# Altium PCB terminal.PcbDoc
Units mm, origin at the board's own origin, x right, y up, seen from the top; angles counter-clockwise.
Board outline 54 x 58 mm, 2 copper layers (Top Layer, Bottom Layer); 8 components, 6 nets, 42 pads, 2 vias.
Unrouted connection lines stored in the file: 3.
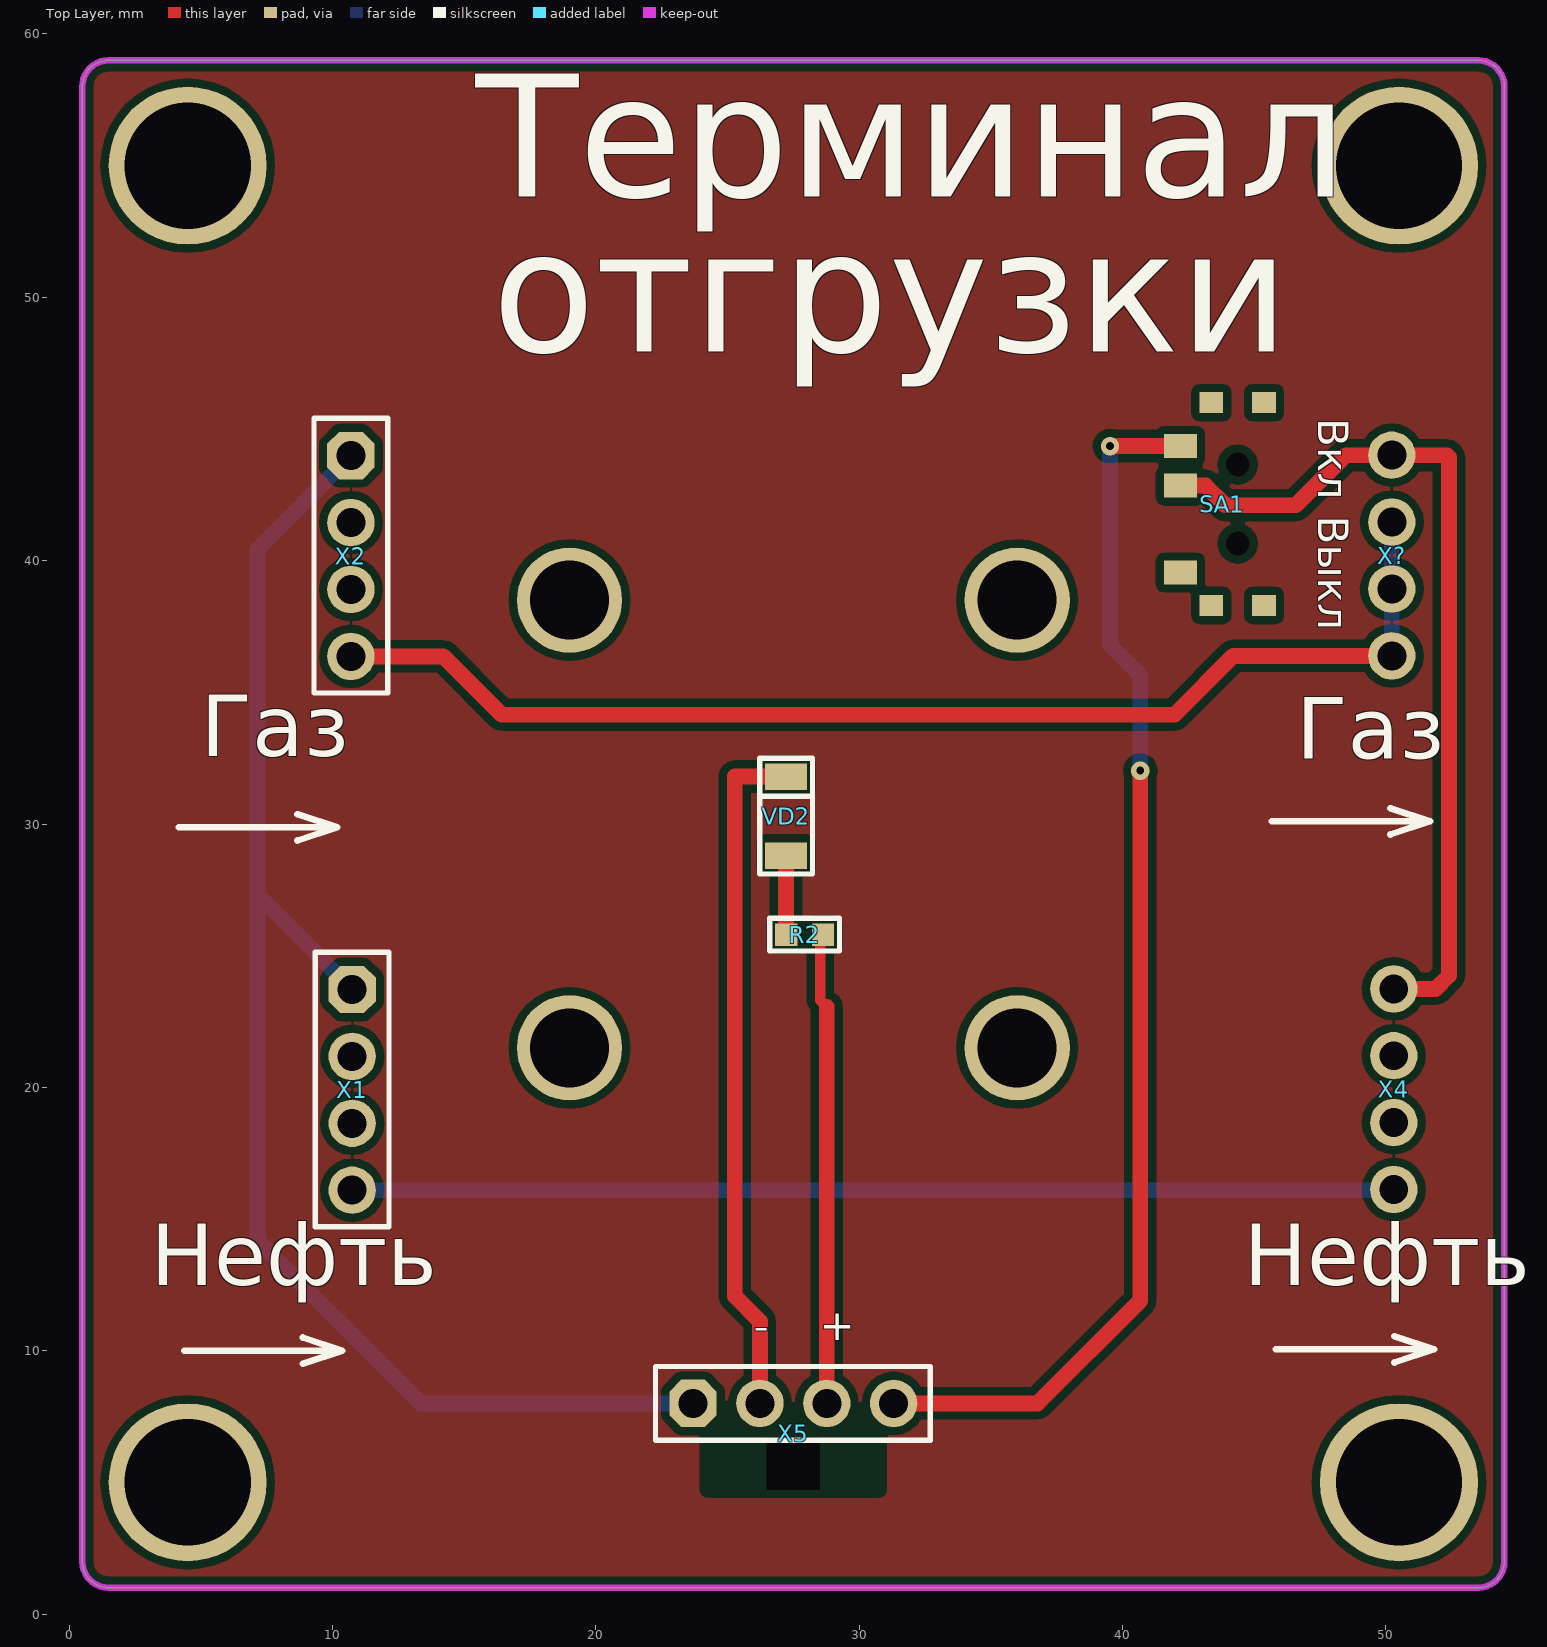
[diagram p0: Top Layer view]
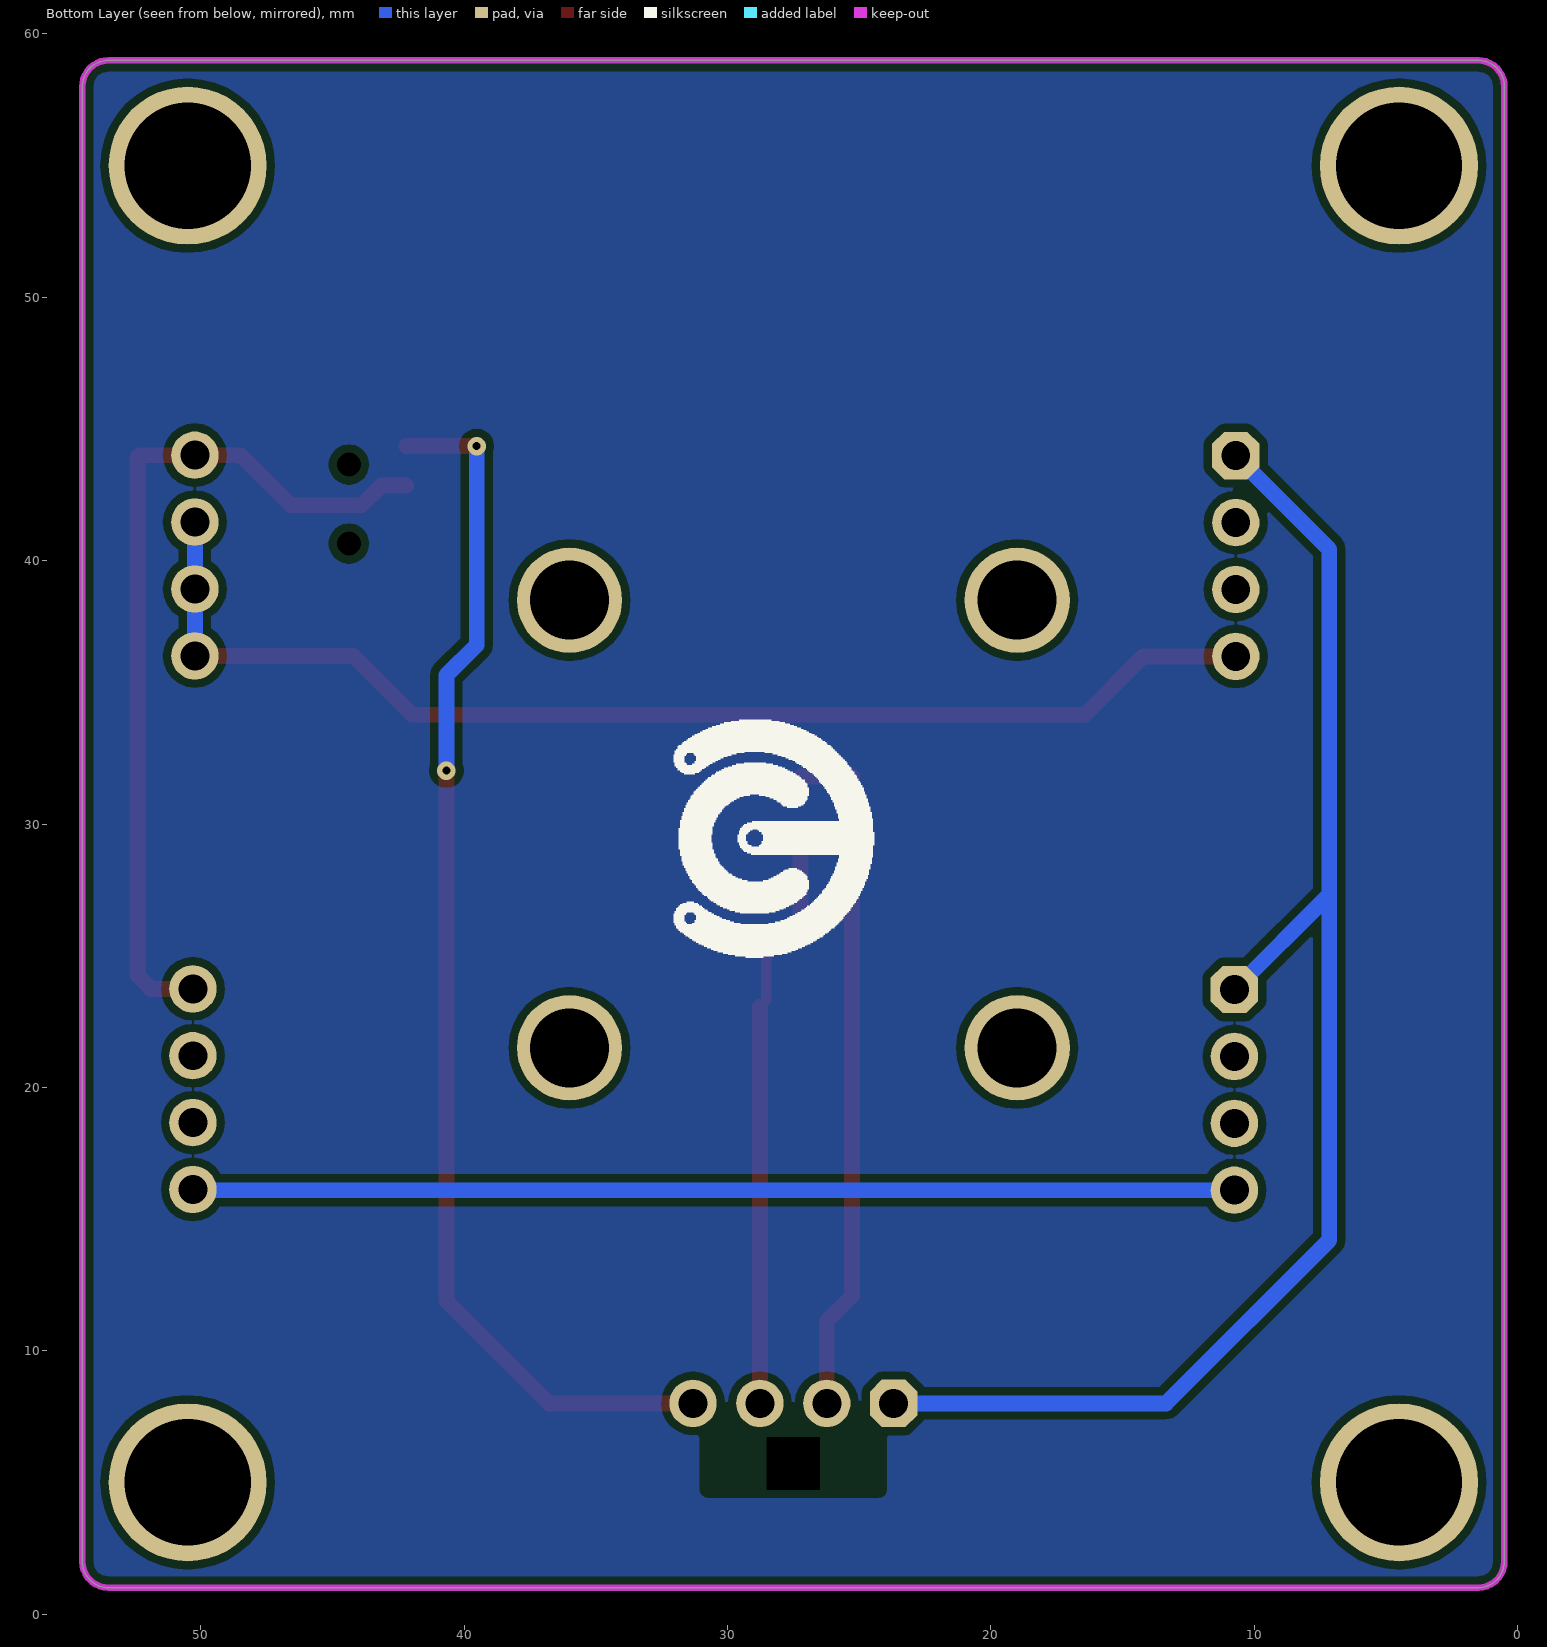
[diagram p1: Bottom Layer view, seen from below]

## Layer stack, top to bottom
Top Solder: solder mask 0.0102, Solder Resist, Dk 3.5
Top Layer: signal copper 0.0356
Dielectric 1: dielectric 0.32, FR-4, Dk 4.8
Bottom Layer: signal copper 0.0356
Bottom Solder: solder mask 0.0102, Solder Resist, Dk 3.5

## Board outline
0.5,2 ccw(c1.5,2) 1.5,1 53.5,1 ccw(c53.5,2) 54.5,2 54.5,58 ccw(c53.5,58) 53.5,59 1.5,59 ccw(c1.5,58) 0.5,58

## Design rules (kind name [scope] priority, off if disabled: settings)
Clearance [All] p1: gap=0.3 ignorepadtopadclearanceinfootprint=FALSE
PolygonConnect [All] p1: connectstyle=Relief reliefconductorwidth=0.254 reliefentries=4 polygonreliefangle="90 Angle" airgapwidth=0.254
RoutingVias [All] p1: holewidth=0.711 width=1.27 viastyle="Through Hole" minholewidth=0.711 minwidth=1.27 maxholewidth=0.711 maxwidth=1.27
SolderMaskExpansion [All] p1: expansion=0.102
Width [All] p1: maxlimit=10 minlimit=0.254 preferedwidth=0.254 minimp=50.000000 maximp=50.000000 favimp=50.000000
30 further rules are at their usual default settings.

## Components (designator, comment, footprint, x,y, rotation, side; value= is the part's Value field where it differs from the comment)
R2 "Resistor film, 100R, ±5%, 0603, 0.1W, -55...+125°C" "RES: 0603" 27.925,25.8 r0 top value=100R
SA1 "SS-3292S-L1" SS-3292S-L1 44.375,42.126 r0 top
VD2 "LED, *, *, *, -55...+150°C" "LED: 1206R" 27.225,30.3 r90 top
X1 "Connector, 4pin, 2.54mm, 500VAC, 3A" "CON: PBS-4 R" 10.75,19.905 r270 top
X2 "Connector, 4pin, 2.54mm, 500VAC, 3A" "CON: PBS-4 R" 10.7,40.175 r270 top
X4 "Connector, 4pin, 2.54mm, 500VAC, 3A" "4PLS RIGHT ANGLE 2" 50.3,19.93 r270 top
X5 "PBS-4 cut" "PBS-4 CUT" 27.5,8 r0 top
X? "Connector, 4pin, 2.54mm, 500VAC, 3A" "4PLS RIGHT ANGLE 2" 50.225,40.195 r270 top

## Footprints (in the part's own frame and the unit in brackets; to place one, negate y for a bottom-side part, rotate by r counter-clockwise, add the part's x,y. Pads: shape width x height; smd on the part's side, far side on the other; paste and mask are expansions set on the pad)
"4PLS RIGHT ANGLE 2" [mm]
  round 1.8 hole 1.1: 1(-3.81,0) 2(-1.27,0) 3(1.27,0) 4(3.81,0)
  body extent -5.04,-0.32 5.14,10.04, height 2.57
"CON: PBS-4 R" [mm] "PBS-5"
  oct 1.8x1.8 hole 1.1: 1(-3.81,0)
  round 1.8 hole 1.1: 2(-1.27,0) 3(1.27,0) 4(3.81,0)
  silkscreen extent -5.23,-1.4 5.2,1.4, body extent -5.08,-10.2 5.08,0, height 2.54
"LED: 1206R" [mm]
  rect 1x1.6 smd: 1(-1.5,0) 2(1.5,0)
  silkscreen extent -2.2,-1 2.2,1, body extent -1.6,-0.8 1.6,0.8, height 1.1
"PBS-4 CUT" [mm]
  oct 1.8x1.8 hole 1.1: 1(-3.81,0)
  round 1.8 hole 1.1: 2(-1.27,0) 3(1.27,0) 4(3.81,0)
  rrect50% 0x0 hole 2 square: ""(0,-2.28)
  silkscreen extent -5.23,-1.4 5.2,1.4, body extent -5.08,-1.27 5.08,1.27, height 8.4
"RES: 0603" [mm]
  rect 0.85x0.85 smd: 1(-0.7,0) 2(0.7,0)
  silkscreen extent -1.33,-0.63 1.33,0.63, body extent -0.8,-0.4 0.8,0.4, height 0.44
SS-3292S-L1 [mm]
  rect 1.25x0.9 smd: 1(-2.175,-2.576) 2(-2.175,0.724) 3(-2.175,2.224)
  rect 0.9x0.8 smd: ""(-1,-3.826) ""(-1,3.874) ""(1,-3.826) ""(1,3.874)
  round 0 hole 0.9 unplated: ""(0,-1.476) ""(0,1.524)
  body extent -1.52,-4.32 1.52,4.44, height 6

## Part data
R2: library part Resistor_0603, Manufacturer=Yageo, Package=0603, PartNumber=RC0603JR-07100RL, Power=0.1W, Temperature=-55...+125°C, Tolerance=±5%, TypeResistor="Resistor film", HelpURL=https://www.digikey.com/product-detail/en/yageo/RC0603JR-07100RL/311-100GRCT-ND/729644, ValueManufacturerPartNumber="Resistor film, 100R, ±5%, 0603, 0.1W, -55...+125°C"
VD2: library part LED_single, Color=GREEN, Temperature=-55...+150°C, TypeDiode=LED, ValueManufacturerPartNumber="LED, *, *, *, -55...+150°C"
X1 X2: library part PBS-4, CurrentMax=3A, Manufacturer=Connfly, VoltageMax=500VAC, CommentText="\"Разъем\"", HelpURL=https://www.chipdip.ru/product/pbs-4, Multichannel=4pin, PartNumber=PBS-4, Pitch=2.54mm, TypeConnector=Connector, ValueManufacturerPartNumber="Connector, 4pin, 2.54mm, 500VAC, 3A"
X4 X?: library part PLS-4, CurrentMax=3A, Manufacturer=Connfly, VoltageMax=500VAC, CommentText="\"Разъем\"", HelpURL=https://www.chipdip.ru/product/pls-4, Multichannel=4pin, PartNumber=PLS-4, Pitch=2.54mm, TypeConnector=Connector, ValueManufacturerPartNumber="Connector, 4pin, 2.54mm, 500VAC, 3A"

## Free pads (board coordinates)
  round 6 hole 4.8: ""(4.5,5) ""(4.5,55) ""(50.5,5) ""(50.5,55)
  round 4 hole 3: ""(19,21.5) ""(19,38.5) ""(36,21.5) ""(36,38.5)

## Via types
v1: diameter 0.7, hole 0.3, Top Layer to Bottom Layer, 2 vias

## Nets (pads, with @x,y where several pads share a name; then routed paths per layer and width w, separated by ;. In a path a pad name is that pad's centre, name@x,y a point inside that pad or via, vN(x,y) a via of type N, cw(c..) or ccw(c..) an arc to the next point about the centre after c; other vN are vias at no path point)
GND: SA1.3 VD2.2 X1.1 X2.1 X5.1 X5.2 X5.4 | length 128.2
  Top Layer w0.6: X5.2 26.23,11.12 25.275,12.075 25.275,31.8 VD2.2 ; X5.4 36.775,8 40.675,11.9 v1(40.675,32.025) ; v1(39.525,44.35) SA1.3
  Bottom Layer w0.6: X2.1 7.15,40.435 7.15,27.315 ; X1.1 7.15,27.315 ; X5.1 13.35,8 7.15,14.2 7.15,27.315 ; v1(39.525,44.35) 39.525,36.8 40.675,35.65 v1(40.675,32.025)
NetR2_1: R2.1 VD2.1 | length 3
  Top Layer w0.6: R2.1 VD2.1
NetSA1_2: SA1.2 X4.1 X?.1 | length 33.3
  Top Layer w0.6: SA1.2 43.15,42.85 43.9,42.1 46.575,42.1 48.48,44.005 X?.1 52.32,44.005 52.4,43.925 52.4,24.25 51.89,23.74 X4.1
NetX1_2: 
NetX2_4: X1.4 X2.4 X4.4 X?.2 X?.3 X?.4 | length 86
  Top Layer w0.6: X2.4 14.21,36.365 16.425,34.15 41.975,34.15 44.21,36.385 X?.4
  Bottom Layer w0.6: X1.4 50.275,16.095 X4.4 ; X?.4 X?.3 X?.2
VCC: R2.2 X5.3 | length 17.9
  Top Layer w0.4: R2.2 28.525,25.7 28.525,23.3 28.77,23.055
  Top Layer w0.6: X5.3 28.77,23.055
pads on no net: SA1. SA1.1 X1.2 X1.3 X2.2 X2.3 X4.2 X4.3 X5.

## Polygon pours and split planes (outlines as drawn)
no net on Top Layer "Top Layer-No Net" (solid, pour order 6): 0.5,2 ccw(c1.5,2) 1.5,1 53.5,1 ccw(c53.5,2) 54.5,2 54.5,58 ccw(c53.5,58) 53.5,59 1.5,59 ccw(c1.5,58) 0.5,58
no net on Bottom Layer "Top Layer-No Net1" (solid, pour order 7): 0.5,2 ccw(c1.5,2) 1.5,1 53.5,1 ccw(c53.5,2) 54.5,2 54.5,58 ccw(c53.5,58) 53.5,59 1.5,59 ccw(c1.5,58) 0.5,58

## Keep-outs
Keep-Out Layer:
  the board outline again, w0.254

## Silkscreen, mask and mechanical layers (free items; w line width, h text height)
Top Overlay:
  lines w0.254: 4.175,29.875 10.175,29.875 ; 4.375,10 10.375,10 ; 8.675,29.375 10.175,29.875 ; 8.675,30.375 10.175,29.875 ; 8.875,9.5 10.375,10 ; 8.875,10.5 10.375,10 ; 45.675,30.1 51.675,30.1 ; 45.825,10.05 51.825,10.05 ; 50.175,29.6 51.675,30.1 ; 50.175,30.6 51.675,30.1 ; 50.325,9.55 51.825,10.05 ; 50.325,10.55 51.825,10.05
  text "Терминал" at 15.45,52.275 h8
  text "отгрузки" at 16.075,46.4 h8
  text "Вкл" at 47.025,45.4 h2 r270
  text "Выкл" at 47.025,41.7 h2 r270
  text "Газ" at 5,31.8 h4
  text "Газ" at 46.6,31.7 h4
  text "Нефть" at 3.1,11.7 h4
  text "Нефть" at 44.6,11.7 h4
  text "-" at 26,10 h2
  text "+" at 28.5,10 h2
Bottom Overlay:
  drawing of 376 lines, arcs and shapes, not listed